# Altium PCB Level_Shifter.PcbDoc
Units mil, origin at the board's own origin, x right, y up, seen from the top; angles counter-clockwise.
Board outline 6000 x 4000 mil, 2 copper layers (Top Layer, Bottom Layer); 34 components, 34 nets, 94 pads, 0 vias.
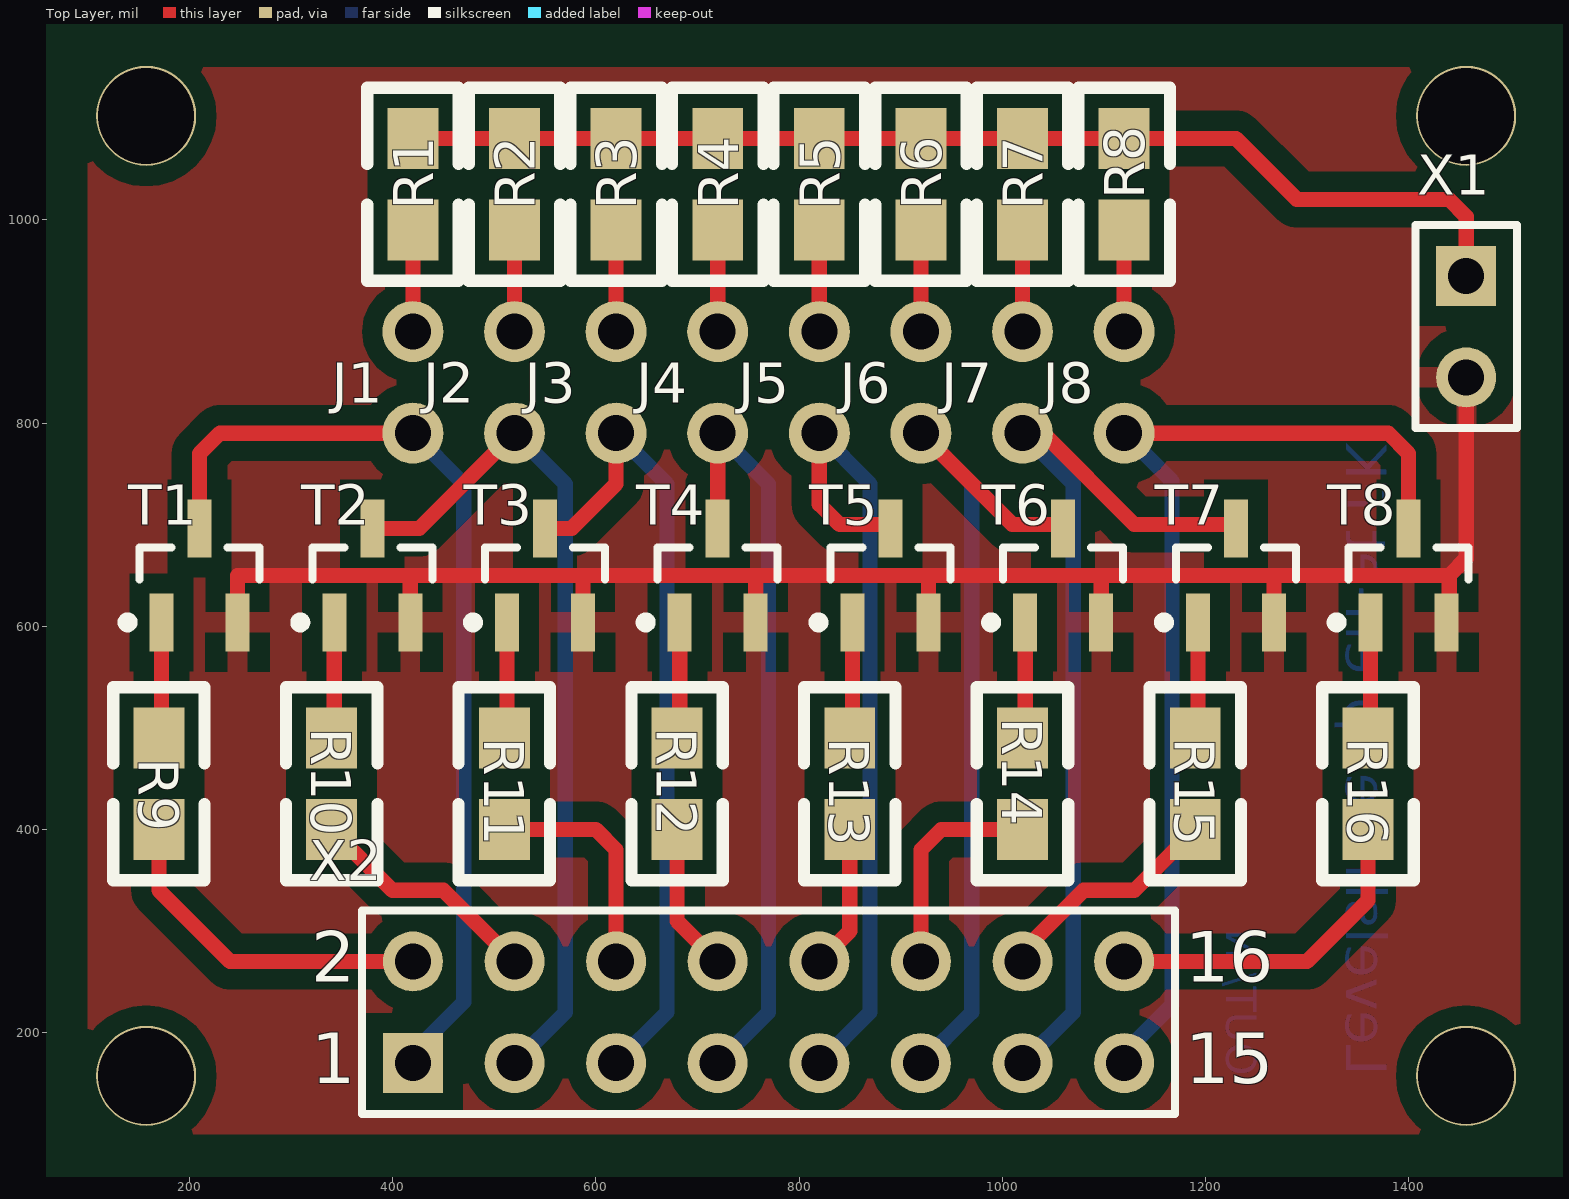
[diagram p0: Top Layer view]
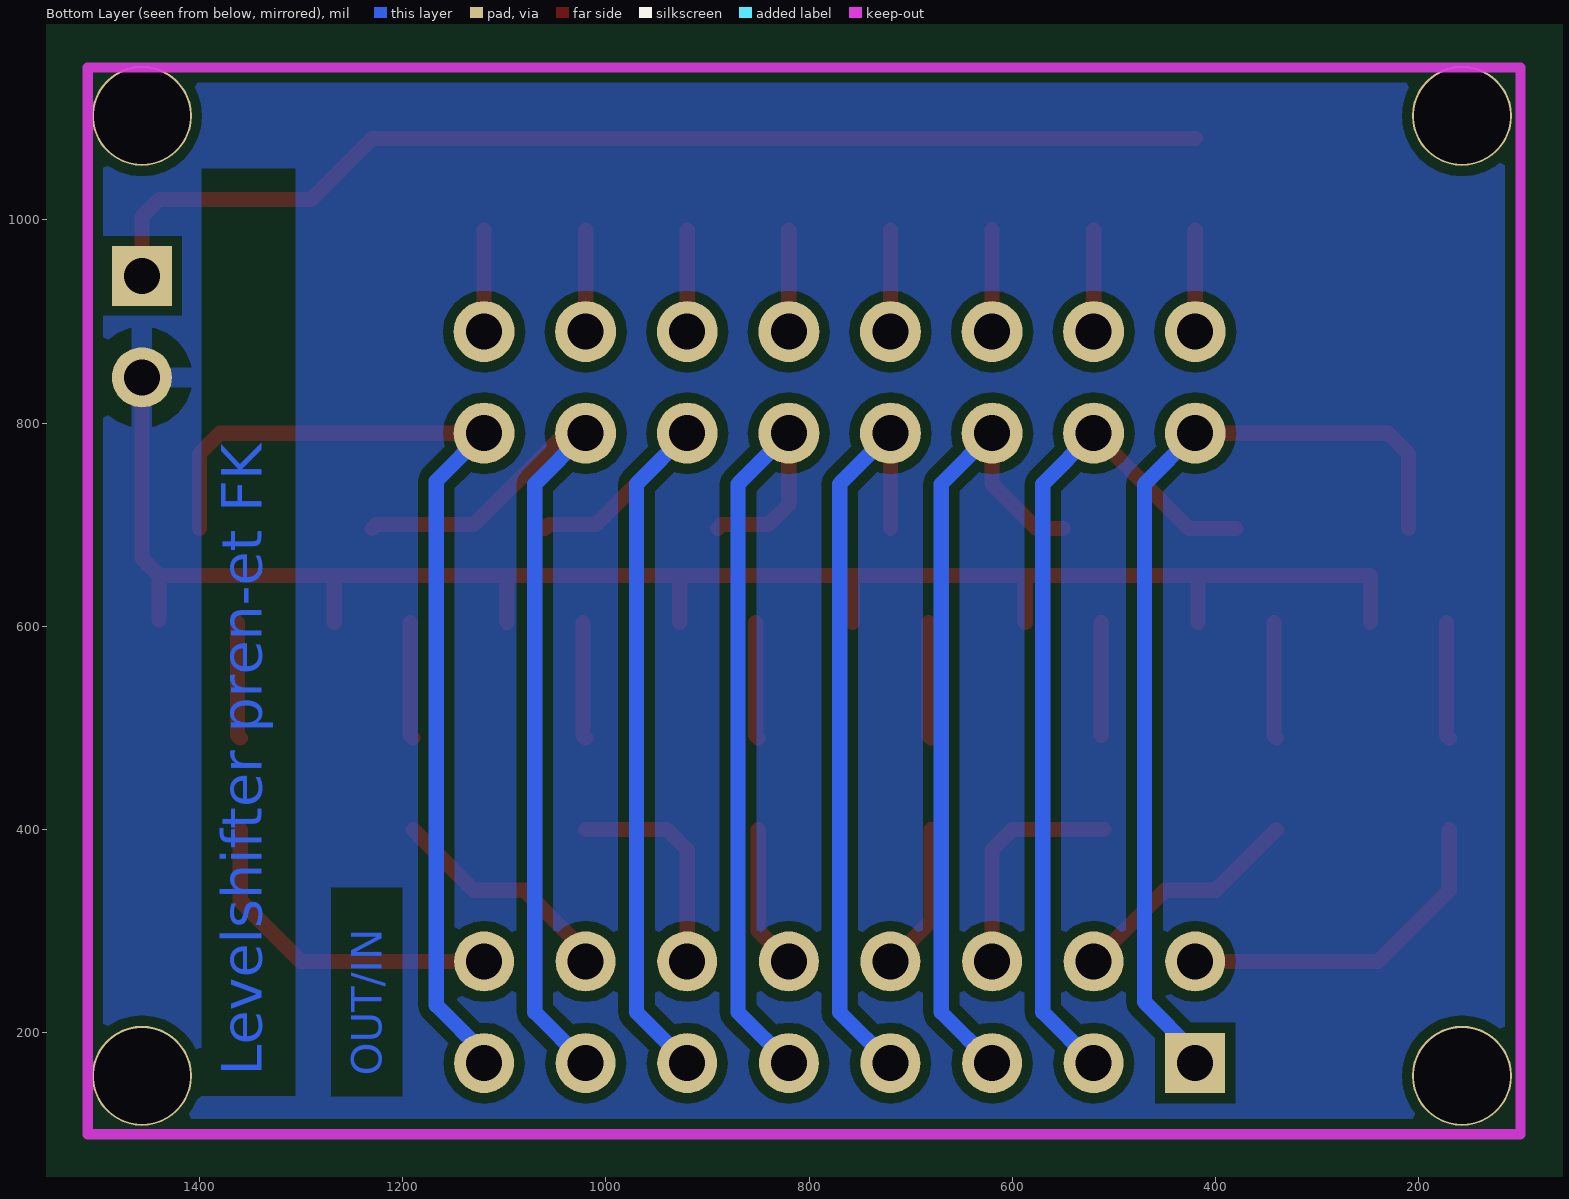
[diagram p1: Bottom Layer view, seen from below]

## Layer stack, top to bottom
Top Solder: solder mask 0.4, Solder Resist, Dk 3.5
Top Layer: signal copper 1.4
Dielectric 1: dielectric 12.6, FR-4, Dk 4.8
Bottom Layer: signal copper 1.4
Bottom Solder: solder mask 0.4, Solder Resist, Dk 3.5

## Board outline
-3130,-1380 2870,-1380 2870,2620 -3130,2620

## Design rules (kind name [scope] priority, off if disabled: settings)
Clearance [All] p1: gap=10
PlaneConnect [All] p1: planeconnectstyle=Relief reliefexpansion=20 reliefentries=4 reliefconductorwidth=20 reliefairgap=20
PolygonConnect [All] p1: connectstyle=Relief reliefconductorwidth=20 reliefentries=4 polygonreliefangle="90 Angle" airgapwidth=20
RoutingVias [All] p1: holewidth=28 width=50 viastyle="Through Hole" minholewidth=28 minwidth=50 maxholewidth=28 maxwidth=50
SolderMaskExpansion [All] p1: expansion=4
UnpouredPolygon [All] p1: allowunpoured=FALSE
Width [All] p1: maxlimit=40 minlimit=10 preferedwidth=10
28 further rules are at their usual default settings.

## Components (designator, comment, footprint, x,y, rotation, side; value= is the part's Value field where it differs from the comment)
J1 "Jumper" Jumper 420,790 r90 top
J2 "Jumper" Jumper 520,790 r90 top
J3 "Jumper" Jumper 620,790 r90 top
J4 "Jumper" Jumper 720,790 r90 top
J5 "Jumper" Jumper 820,790 r90 top
J6 "Jumper" Jumper 920,790 r90 top
J7 "Jumper" Jumper 1020,790 r90 top
J8 "Jumper" Jumper 1120,790 r90 top
R1 "10k" 0805 420,990 r90 top
R2 "10k" 0805 520,990 r90 top
R3 "10k" 0805 620,990 r90 top
R4 "10k" 0805 720,990 r90 top
R5 "10k" 0805 820,990 r90 top
R6 "10k" 0805 920,990 r90 top
R7 "10k" 0805 1020,990 r90 top
R8 "10k" 0805 1120,990 r90 top
R9 "2.7k" 0805 170,400 r90 top
R10 "2.7k" 0805 340,400 r90 top
R11 "2.7k" 0805 510,400 r90 top
R12 "2.7k" 0805 680,400 r90 top
R13 "2.7k" 0805 850,400 r90 top
R14 "2.7k" 0805 1020,400 r90 top
R15 "2.7k" 0805 1190,400 r90 top
R16 "2.7k" 0805 1360,400 r90 top
T1 "BSR14" SOT-23A_M 210,650 r90 top
T2 "BSR14" SOT-23A_M 380,650 r90 top
T3 "BSR14" SOT-23A_M 550,650 r90 top
T4 "BSR14" SOT-23A_M 720,650 r90 top
T5 "BSR14" SOT-23A_M 890,650 r90 top
T6 "BSR14" SOT-23A_M 1060,650 r90 top
T7 "BSR14" SOT-23A_M 1230,650 r90 top
T8 "BSR14" SOT-23A_M 1400,650 r90 top
X1 "Power" HDR1X2 1456.69,944.88 r270 top
X2 "Signal IN/OUT" HDR2X8 420,170 r0 top

## Footprints (in the part's own frame and the unit in brackets; to place one, negate y for a bottom-side part, rotate by r counter-clockwise, add the part's x,y. Pads: shape width x height; smd on the part's side, far side on the other; paste and mask are expansions set on the pad)
0805 [mil]
  rect 60x50 smd: 1(0,0) 2(90,0)
  silkscreen extent -50,-45 140,45
HDR1X2 [mm] "Connector; Header; 2 Position"
  rect 1.5x1.5 hole 0.9: 1(0,0)
  round 1.5 hole 0.9: 2(2.54,0)
  silkscreen extent -1.27,-1.27 3.81,1.27
HDR2X8 [mm] "Connector; Header; 8x2 Position"
  rect 1.5x1.5 hole 0.9: 1(0,0)
  round 1.5 hole 0.9: 2(0,2.54) 3(2.54,0) 4(2.54,2.54) 5(5.08,0) 6(5.08,2.54) 7(7.62,0) 8(7.62,2.54) 9(10.16,0) 10(10.16,2.54) 11(12.7,0) 12(12.7,2.54) 13(15.24,0) 14(15.24,2.54) 15(17.78,0) 16(17.78,2.54)
  silkscreen extent -1.27,-1.27 19.05,3.81
Jumper [mil] "Jumper"
  round 60 hole 35.43: 1(0,0) 2(100,0)
SOT-23A_M [mm] "SOT23, 3-Leads, Body 2.9x1.3mm, Pitch 0.95mm, Lead Span 2.3mm, IPC Low Density"
  rect 1.45x0.6 smd: 1(-1.175,0.95) 2(-1.175,-0.95) 3(1.175,0)
  silkscreen extent -1.3,-1.5 0.7,1.92, body extent -0.7,-1.5 0.7,1.5, height 1.09

## Part data
J1 J2 J3 J4 J5 J6 J7 J8: "Wire link"
R1 R2 R3 R4 R5 R6 R7 R8 R9 R10 R11 R12 R13 R14 R15 R16: library part R?, "Normaler Widerstand"
T1 T2 T3 T4 T5 T6 T7 T8: library part BC817-25, "NPN General Purpose Amplifier"
X1: library part "Header 2", "Header, 2-Pin"
X2: library part "Header 8X2", "Header, 8-Pin, Dual row"

## Free pads (board coordinates)
  round 98.43 hole 94.49 unplated: 0(157.48,1102.36) 1(157.48,157.48) 2(1456.69,157.48)
  round 98.43 hole 94.49: 3(1456.69,1102.36)

## Nets (pads, with @x,y where several pads share a name; then routed paths per layer and width w, separated by ;. In a path a pad name is that pad's centre, name@x,y a point inside that pad or via, vN(x,y) a via of type N, cw(c..) or ccw(c..) an arc to the next point about the centre after c; other vN are vias at no path point)
GND: T1.2 T2.2 T3.2 T4.2 T5.2 T6.2 T7.2 T8.2 X1.2 | length 1947.5
  Top Layer w15: T1.2 247.4,650 417.4,650 ; T2.2 417.4,650 ; T2.2@417.4,617.4 417.4,650 ; T3.2 587.4,650 ; T3.2@587.4,617.4 587.4,650 ; T4.2 757.4,650 ; T4.2@757.4,627.4 757.4,650 ; T5.2 927.4,650 ; T5.2@927.4,617.4 927.4,650 ; T6.2 1097.4,650 ; T6.2@1097.4,617.4 1097.4,650 ; T7.2 1267.4,650 ; T7.2@1267.4,617.4 1267.4,650 ; T8.2@1440,606.34 1440,650 ; X1.2 1456.69,666.69 1440,650 ; 417.4,650 587.4,650 ; 587.4,650 757.4,650 ; 757.4,650 927.4,650 ; 927.4,650 1097.4,650 ; 1097.4,650 1267.4,650 ; 1267.4,650 1440,650
NetJ1_1: J1.1 T1.3 X2.1 | length 963.4
  Top Layer w15: T1.3 210,770 230,790 J1.1
  Bottom Layer w15: J1.1@410,790 J1.1 470,740 470,230 420,180 X2.1
NetJ1_2: J1.2 R1.1 | length 100
  Top Layer w15: J1.2 R1.1
NetJ2_1: J2.1 T2.3 X2.3 | length 840.2
  Top Layer w15: T2.3 426.26,696.26 J2.1
  Bottom Layer w15: X2.3 570,220 570,740 J2.1
NetJ2_2: J2.2 R2.1 | length 100
  Top Layer w15: J2.2 R2.1
NetJ3_1: J3.1 T3.3 X2.5 | length 799.5
  Top Layer w15: T3.3 576.26,696.26 620,740 J3.1
  Bottom Layer w15: X2.5 670,220 670,740 J3.1
NetJ3_2: J3.2 R3.1 | length 100
  Top Layer w15: J3.2 R3.1
NetJ4_1: J4.1 T4.3 X2.7 | length 755.2
  Top Layer w15: T4.3 J4.1
  Bottom Layer w15: X2.7 770,220 770,740 J4.1
NetJ4_2: J4.2 R4.1 | length 100
  Top Layer w15: J4.2 R4.1
NetJ5_1: J5.1 T5.3 X2.9 | length 821.3
  Top Layer w15: J5.1@830,790 J5.1 820,720 840,700 886.26,700 T5.3
  Bottom Layer w15: X2.9 870,220 870,740 J5.1
NetJ5_2: J5.2 R5.1 | length 100
  Top Layer w15: J5.2 R5.1
NetJ6_1: J6.1 T6.3 X2.11 | length 840.2
  Top Layer w15: J6.1 1010,700 1056.26,700 T6.3
  Bottom Layer w15: X2.11 970,220 970,740 J6.1
NetJ6_2: J6.2 R6.1 | length 100
  Top Layer w15: J6.2 R6.1
NetJ7_1: J7.1 T7.3 X2.13 | length 910.2
  Top Layer w15: J7.1 1040,790 1130,700 1226.26,700 T7.3
  Bottom Layer w15: X2.13 1070,220 1070,740 J7.1
NetJ7_2: J7.2 R7.1 | length 100
  Top Layer w15: J7.2 R7.1
NetJ8_1: J8.1 T8.3 X2.15 | length 1021
  Top Layer w15: J8.1 1380,790 1400,770 T8.3
  Bottom Layer w15: X2.15 1120,180 1167.03,227.03 1167.03,742.97 J8.1
NetJ8_2: J8.2 R8.1 | length 100
  Top Layer w15: J8.2 R8.1
NetR9_1: R9.1 X2.2 | length 339
  Top Layer w15: R9.1 170,340 240,270 X2.2
NetR9_2: R9.2 T1.1 | length 114.8
  Top Layer w15: R9.2 172.6,492.6 T1.1
NetR10_1: R10.1 X2.4 | length 233.8
  Top Layer w15: R10.1 400,340 450,340 X2.4
NetR10_2: R10.2 T2.1 | length 114.8
  Top Layer w15: R10.2 342.6,492.6 T2.1
NetR11_1: R11.1 X2.6 | length 228.3
  Top Layer w15: R11.1 600,400 620,380 X2.6
NetR11_2: R11.2 T3.1 | length 111.1
  Top Layer w15: R11.2@512.6,492.6 T3.1
NetR12_1: R12.1 X2.8 | length 146.6
  Top Layer w15: R12.1 680,310 X2.8
NetR12_2: R12.2 T4.1 | length 114.8
  Top Layer w15: R12.2 682.6,492.6 T4.1
NetR13_1: R13.1 X2.10 | length 142.4
  Top Layer w15: X2.10 850,300 R13.1
NetR13_2: R13.2 T5.1 | length 114.8
  Top Layer w15: R13.2 852.6,492.6 T5.1
NetR14_1: R14.1 X2.12 | length 218.3
  Top Layer w15: X2.12 920,380 940,400 R14.1
NetR14_2: R14.2 T6.1 | length 114.8
  Top Layer w15: R14.2 1022.6,492.6 T6.1
NetR15_1: R15.1 X2.14 | length 229.7
  Top Layer w15: X2.14 1020,280 1080,340 1130,340 R15.1
NetR15_2: R15.2 T7.1 | length 114.8
  Top Layer w15: R15.2 1192.6,492.6 T7.1
NetR16_1: R16.1 X2.16 | length 334.9
  Top Layer w15: X2.16 1300,270 1360,330 R16.1
NetR16_2: R16.2 T8.1 | length 114.8
  Top Layer w15: R16.2 1362.6,492.6 T8.1
VCC: R1.2 R2.2 R3.2 R4.2 R5.2 R6.2 R7.2 R8.2 X1.1 | length 1126.9
  Top Layer w15: R1.2 R2.2 R3.2 R4.2 R5.2 R6.2 R7.2 R8.2 1230,1080 1290,1020 1440,1020 1456.69,1003.31 X1.1

## Polygon pours and split planes (outlines as drawn)
GND on Top Layer "GND_Polygon" (solid, pour order 2): 100,1150 1510,1150 1510,110 1500,100 110,100 100,110 100,1150
GND on Bottom Layer "GND_Polygon" (solid, pour order 4): 100,1150 1510,1150 1510,100 100,100 100,1150

## Keep-outs
Bottom Layer:
  lines w10: 100,100 1510,100 1510,1150 100,1150 100,100

## Other copper
Bottom Layer:
  text "OUT/IN" at 1220.47,157.48 h30 r270
  text "Levelshifter pren-et FK" at 1338.58,157.48 h40 r270

## Silkscreen, mask and mechanical layers (free items; w line width, h text height)
Mechanical 1:
  lines w15: 0,10 0,0 ; 0,0 1600,0 1600,1250 0,1250 0,0

## Text inside footprints (layer, text, board x,y; h text height)
X2: Top Overlay "2" at 320,250 h50; Top Overlay "1" at 320,150 h50; Top Overlay "15" at 1180,150 h50; Top Overlay "16" at 1180,250 h50